# Altium PCB Array V1.PcbDoc (part 2 of 2)
Units mm, origin at the board's own origin, x right, y up, seen from the top; angles counter-clockwise.
Board outline 84 x 84 mm, 4 copper layers (Top Copper, GND, VS, Bottom Copper), stack 1.97 mm thick; 132 components, 130 nets, 568 pads, 280 vias.
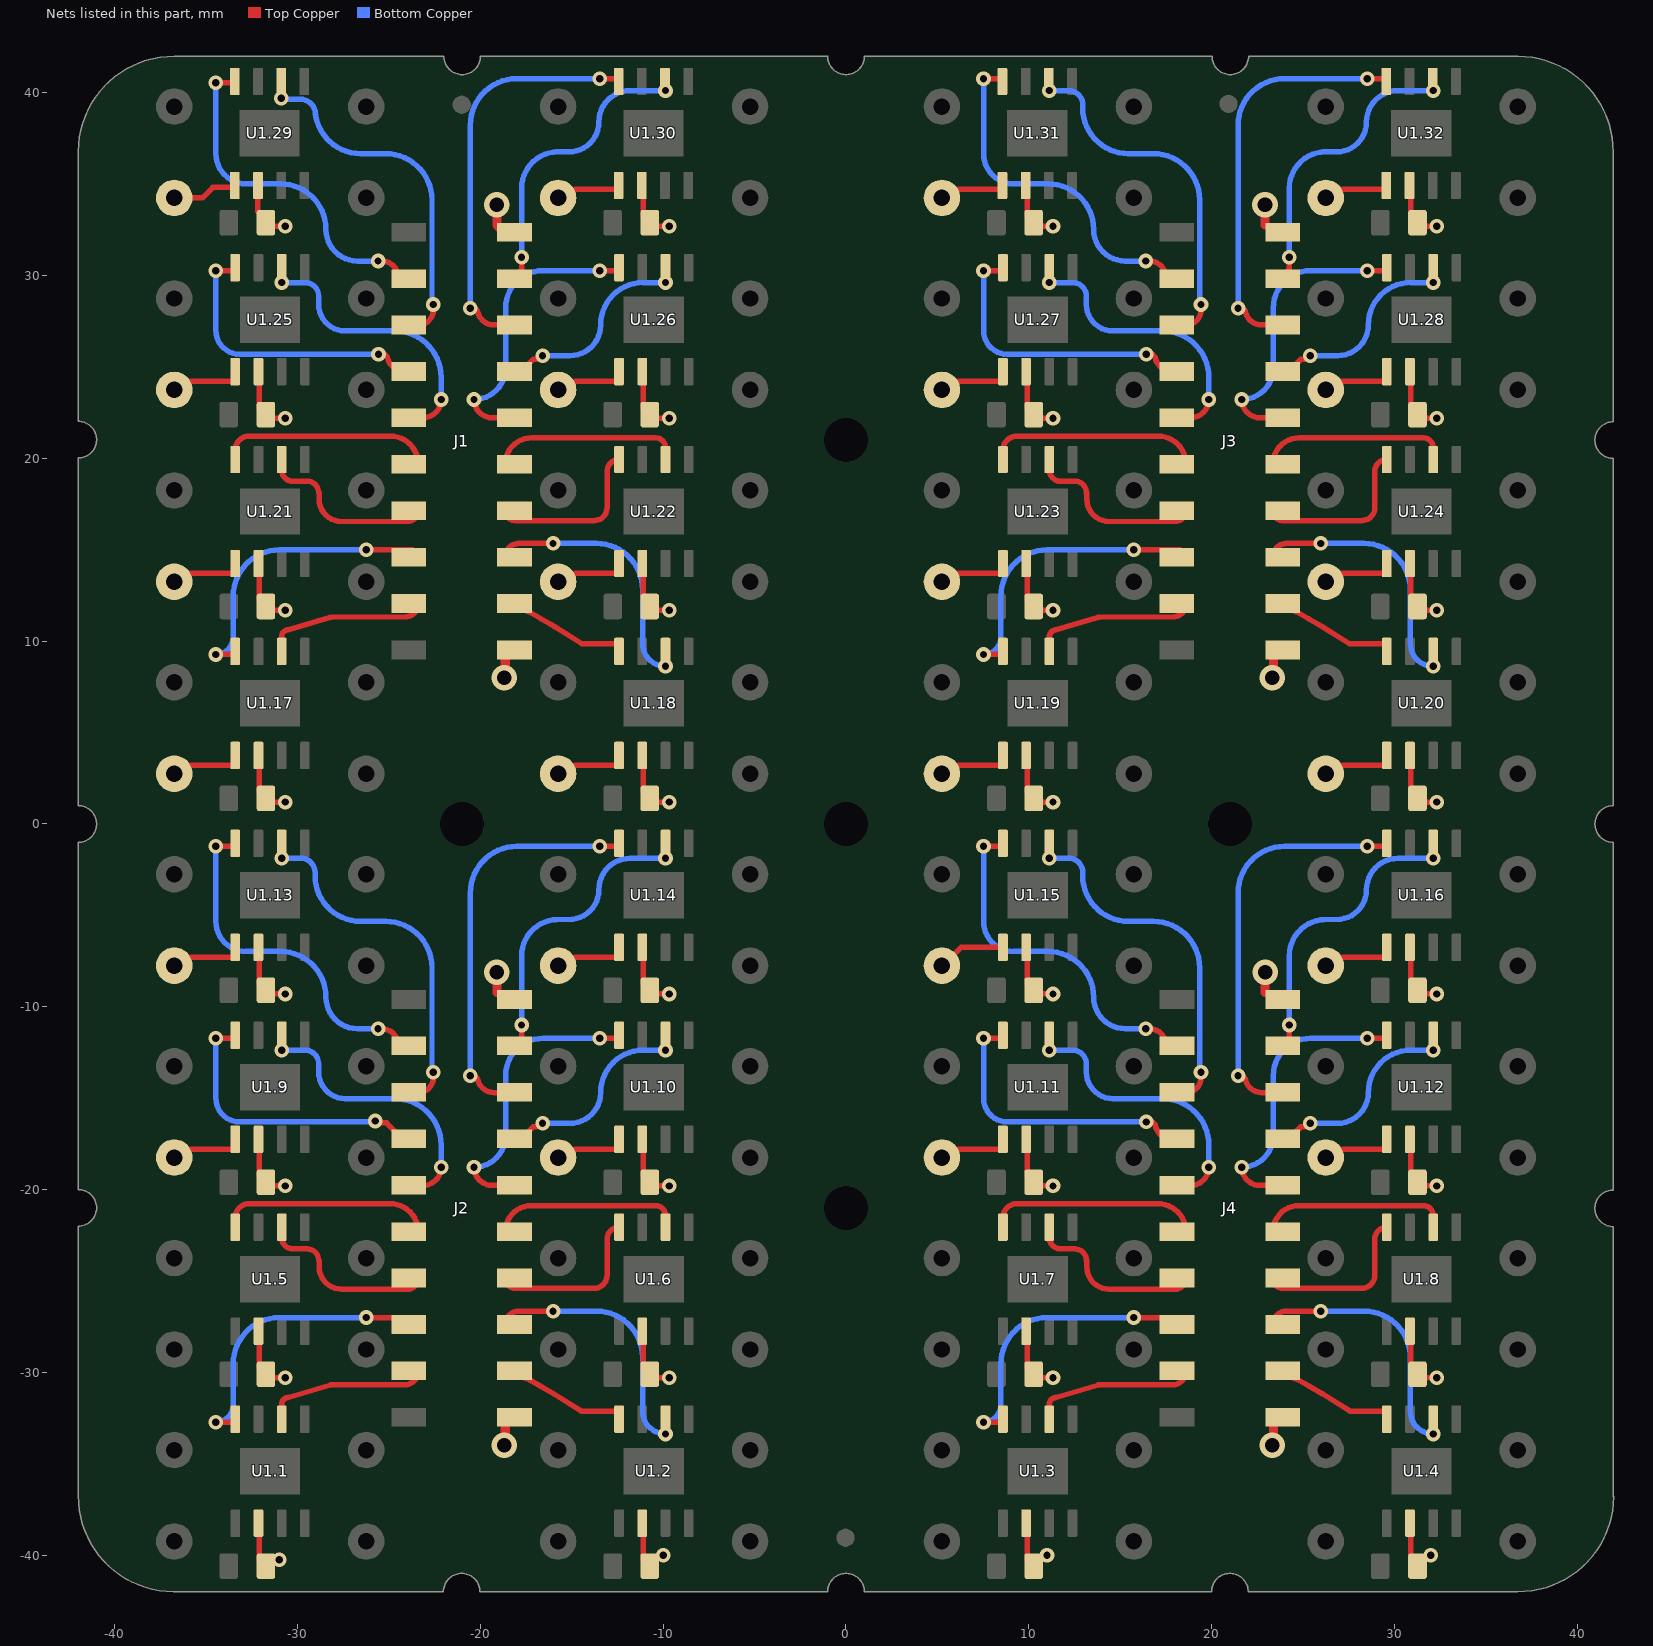
[diagram p4: the nets of this part, all layers, seen from the top]

## Via types
v1: diameter 0.8, hole 0.4, Top Copper to Bottom Copper, tented both sides, 144 vias
v2: diameter 0.8, hole 0.4, Top Copper to Bottom Copper, tented bottom, 128 vias
v3: diameter 1.4, hole 0.8, Top Copper to Bottom Copper, tented both sides, 8 vias

## Nets (pads, with @x,y where several pads share a name; then routed paths per layer and width w, separated by ;. In a path a pad name is that pad's centre, name@x,y a point inside that pad or via, vN(x,y) a via of type N, cw(c..) or ccw(c..) an arc to the next point about the centre after c; other vN are vias at no path point) (continued)
Out2.9: 41.+ U1.9.5 | length 4
  Top Copper w0.3: 41.+@-36.75,-18.25 -36.29,-18.25 -35.824,-17.784 -33.53,-17.784 -33.415,-17.669 U1.9.5@-33.415,-17.25
Out2.10: 43.+ U1.10.5 | length 4
  Top Copper w0.3: 43.+@-15.75,-18.25 -15.29,-18.25 -14.824,-17.784 -12.53,-17.784 -12.415,-17.669 U1.10.5@-12.415,-17.25
Out2.11: 45.+ U1.11.5 | length 4
  Top Copper w0.3: 45.+@5.25,-18.25 5.71,-18.25 6.176,-17.784 8.47,-17.784 8.585,-17.669 U1.11.5@8.585,-17.25
Out2.12: 47.+ U1.12.5 | length 4
  Top Copper w0.3: 47.+@26.25,-18.25 26.71,-18.25 27.176,-17.784 29.47,-17.784 29.585,-17.669 U1.12.5@29.585,-17.25
Out2.13: 33.+ U1.13.5 | length 4
  Top Copper w0.3: 33.+@-36.75,-7.75 -36.29,-7.75 -35.824,-7.284 -33.53,-7.284 -33.415,-7.169 U1.13.5@-33.415,-6.75
Out2.14: 35.+ U1.14.5 | length 4
  Top Copper w0.3: 35.+@-15.75,-7.75 -15.29,-7.75 -14.824,-7.284 -12.53,-7.284 -12.415,-7.169 U1.14.5@-12.415,-6.75
Out2.15: 37.+ U1.15.5 | length 3.7
  Top Copper w0.3: 37.+@5.25,-7.75 5.301,-7.75 6.301,-6.75 U1.15.5@8.585,-6.75
Out2.16: 39.+ U1.16.5 | length 4
  Top Copper w0.3: 39.+@26.25,-7.75 26.71,-7.75 27.176,-7.284 29.47,-7.284 29.585,-7.169 U1.16.5@29.585,-6.75
Out2.17: 25.+ U1.17.5 | length 4
  Top Copper w0.3: 25.+@-36.75,2.75 -36.29,2.75 -35.824,3.216 -33.53,3.216 -33.415,3.331 U1.17.5@-33.415,3.75
Out2.18: 27.+ U1.18.5 | length 4
  Top Copper w0.3: 27.+@-15.75,2.75 -15.29,2.75 -14.824,3.216 -12.53,3.216 -12.415,3.331 U1.18.5@-12.415,3.75
Out2.19: 29.+ U1.19.5 | length 4
  Top Copper w0.3: 29.+@5.25,2.75 5.71,2.75 6.176,3.216 8.47,3.216 8.585,3.331 U1.19.5@8.585,3.75
Out2.20: 31.+ U1.20.5 | length 4
  Top Copper w0.3: 31.+@26.25,2.75 26.71,2.75 27.176,3.216 29.47,3.216 29.585,3.331 U1.20.5@29.585,3.75
Out2.21: 17.+ U1.21.5 | length 4
  Top Copper w0.3: 17.+@-36.75,13.25 -36.29,13.25 -35.824,13.716 -33.53,13.716 -33.415,13.831 U1.21.5@-33.415,14.25
Out2.22: 19.+ U1.22.5 | length 4
  Top Copper w0.3: 19.+@-15.75,13.25 -15.29,13.25 -14.824,13.716 -12.53,13.716 -12.415,13.831 U1.22.5@-12.415,14.25
Out2.23: 21.+ U1.23.5 | length 4
  Top Copper w0.3: 21.+@5.25,13.25 5.71,13.25 6.176,13.716 8.47,13.716 8.585,13.831 U1.23.5@8.585,14.25
Out2.24: 23.+ U1.24.5 | length 4
  Top Copper w0.3: 23.+@26.25,13.25 26.71,13.25 27.176,13.716 29.47,13.716 29.585,13.831 U1.24.5@29.585,14.25
Out2.25: 9.+ U1.25.5 | length 4
  Top Copper w0.3: 9.+@-36.75,23.75 -36.29,23.75 -35.824,24.216 -33.53,24.216 -33.415,24.331 U1.25.5@-33.415,24.75
Out2.26: 11.+ U1.26.5 | length 4
  Top Copper w0.3: 11.+@-15.75,23.75 -15.29,23.75 -14.824,24.216 -12.53,24.216 -12.415,24.331 U1.26.5@-12.415,24.75
Out2.27: 13.+ U1.27.5 | length 4
  Top Copper w0.3: 13.+@5.25,23.75 5.71,23.75 6.176,24.216 8.47,24.216 8.585,24.331 U1.27.5@8.585,24.75
Out2.28: 15.+ U1.28.5 | length 4
  Top Copper w0.3: 15.+@26.25,23.75 26.71,23.75 27.176,24.216 29.47,24.216 29.585,24.331 U1.28.5@29.585,24.75
Out2.29: 1.+ U1.29.5 | length 4
  Top Copper w0.3: 1.+@-36.75,34.25 -35.214,34.25 -34.632,34.831 -33.415,34.831 U1.29.5@-33.415,35.25
Out2.30: 3.+ U1.30.5 | length 4
  Top Copper w0.3: 3.+@-15.75,34.25 -15.29,34.25 -14.824,34.716 -12.53,34.716 -12.415,34.831 U1.30.5@-12.415,35.25
Out2.31: 5.+ U1.31.5 | length 4
  Top Copper w0.3: 5.+@5.25,34.25 5.71,34.25 6.176,34.716 8.47,34.716 8.585,34.831 U1.31.5@8.585,35.25
Out2.32: 7.+ U1.32.5 | length 4
  Top Copper w0.3: 7.+@26.25,34.25 26.71,34.25 27.176,34.716 29.47,34.716 29.585,34.831 U1.32.5@29.585,35.25
sigA1: J2.17 U1.1.2 | length 9
  Top Copper w0.3: U1.1.2@-30.875,-32.56 -30.875,-31.75 cw(c-30.5,-31.75) -30.5,-31.375 -28.192,-30.688 cw(c-28.106,-30.975) -28.106,-30.675 -24.14,-30.675 ccw(c-24.14,-29.935) J2.17@-23.4,-29.935
sigA2: J2.16 U1.2.2 | length 15.1
  Top Copper w0.3: J2.16@-18.646,-27.395 cw(c-17.901,-27.395) -17.901,-26.65 v1(-16.025,-26.65) ; v1(-9.875,-33.375) U1.2.2@-9.875,-32.56
  Bottom Copper w0.3: v1(-16.025,-26.65) -13.665,-26.65 cw(c-13.665,-29.19) -11.125,-29.19 -11.125,-32.125 ccw(c-9.875,-32.125) v1(-9.875,-33.375)
sigA3: J4.17 U1.3.2 | length 9
  Top Copper w0.3: U1.3.2@11.125,-32.56 11.125,-31.75 cw(c11.5,-31.75) 11.5,-31.375 13.808,-30.688 cw(c13.894,-30.975) 13.894,-30.675 17.86,-30.675 ccw(c17.86,-29.935) J4.17@18.6,-29.935
sigA4: J4.16 U1.4.2 | length 15.1
  Top Copper w0.3: J4.16@23.354,-27.395 cw(c24.099,-27.395) 24.099,-26.65 v1(25.975,-26.65) ; v1(32.125,-33.375) U1.4.2@32.125,-32.56
  Bottom Copper w0.3: v1(25.975,-26.65) 28.335,-26.65 cw(c28.335,-29.19) 30.875,-29.19 30.875,-32.125 ccw(c32.125,-32.125) v1(32.125,-33.375)
sigA5: J2.13 U1.5.2 | length 10.1
  Top Copper w0.3: U1.5.2@-30.875,-22.06 -30.875,-22.625 ccw(c-30.25,-22.625) -30.25,-23.25 -29.475,-23.25 cw(c-29.475,-23.875) -28.85,-23.875 cw(c-28.85,-23.9) -28.825,-23.9 -28.825,-24.225 ccw(c-27.6,-24.225) -27.6,-25.45 -23.995,-25.45 ccw(c-23.995,-24.855) J2.13@-23.4,-24.855
sigA6: J2.12 U1.6.2 | length 10.5
  Top Copper w0.3: J2.12@-18.646,-22.315 cw(c-17.206,-22.315) -17.206,-20.875 -10.425,-20.875 cw(c-10.425,-21.425) -9.875,-21.425 U1.6.2@-9.875,-22.06
sigA7: J4.13 U1.7.2 | length 10.1
  Top Copper w0.3: U1.7.2@11.125,-22.06 11.125,-22.625 ccw(c11.75,-22.625) 11.75,-23.25 12.525,-23.25 cw(c12.525,-23.875) 13.15,-23.875 cw(c13.15,-23.9) 13.175,-23.9 13.175,-24.225 ccw(c14.4,-24.225) 14.4,-25.45 18.005,-25.45 ccw(c18.005,-24.855) J4.13@18.6,-24.855
sigA8: J4.12 U1.8.2 | length 10.5
  Top Copper w0.3: J4.12@23.354,-22.315 cw(c24.794,-22.315) 24.794,-20.875 31.575,-20.875 cw(c31.575,-21.425) 32.125,-21.425 U1.8.2@32.125,-22.06
sigA9: J2.09 U1.9.2 | length 15.7
  Top Copper w0.3: v1(-30.875,-12.375) -30.875,-12.16 U1.9.2@-30.875,-11.56 ; J2.09@-23.4,-19.775 -23.15,-19.775 ccw(c-23.15,-18.775) v1(-22.15,-18.775)
  Bottom Copper w0.3: v1(-30.875,-12.375) -29.6,-12.375 cw(c-29.6,-13.125) -28.85,-13.125 -28.85,-13.575 ccw(c-27.4,-13.575) -27.4,-15.025 -24.69,-15.025 cw(c-24.69,-17.565) -22.15,-17.565 v1(-22.15,-18.775)
sigA10: J2.08 U1.10.2 | length 12.2
  Top Copper w0.3: J2.08@-18.646,-17.235 -17.781,-17.235 -17.121,-16.575 -16.935,-16.575 -16.735,-16.375 v1(-16.6,-16.375) ; v1(-9.875,-12.375) U1.10.2@-9.875,-11.56
  Bottom Copper w0.3: v1(-16.6,-16.375) -15.1,-16.375 ccw(c-15.1,-14.7) -13.425,-14.7 cw(c-11.1,-14.7) -11.1,-12.375 v1(-9.875,-12.375)
sigA11: J4.09 U1.11.2 | length 15.7
  Top Copper w0.3: v1(11.125,-12.375) 11.125,-12.16 U1.11.2@11.125,-11.56 ; J4.09@18.6,-19.775 18.85,-19.775 ccw(c18.85,-18.775) v1(19.85,-18.775)
  Bottom Copper w0.3: v1(11.125,-12.375) 12.4,-12.375 cw(c12.4,-13.125) 13.15,-13.125 13.15,-13.575 ccw(c14.6,-13.575) 14.6,-15.025 17.31,-15.025 cw(c17.31,-17.565) 19.85,-17.565 v1(19.85,-18.775)
sigA12: J4.08 U1.12.2 | length 12.2
  Top Copper w0.3: J4.08@23.354,-17.235 24.219,-17.235 24.879,-16.575 25.065,-16.575 25.265,-16.375 v1(25.4,-16.375) ; v1(32.125,-12.375) U1.12.2@32.125,-11.56
  Bottom Copper w0.3: v1(25.4,-16.375) 26.9,-16.375 ccw(c26.9,-14.7) 28.575,-14.7 cw(c30.9,-14.7) 30.9,-12.375 v1(32.125,-12.375)
sigA13: J2.05 U1.13.2 | length 19.9
  Top Copper w0.3: v1(-30.875,-1.875) U1.13.2@-30.875,-1.06 ; J2.05@-23.4,-14.695 ccw(c-23.4,-13.87) -22.575,-13.87 v1(-22.575,-13.575)
  Bottom Copper w0.3: v1(-30.875,-1.875) -29.825,-1.875 cw(c-29.825,-2.65) -29.05,-2.65 -29.05,-2.825 ccw(c-26.55,-2.825) -26.55,-5.325 -25.19,-5.325 cw(c-25.19,-7.865) -22.65,-7.865 -22.65,-13.5 v1(-22.575,-13.575)
sigA14: J2.04 U1.14.2 | length 17.3
  Top Copper w0.3: J2.04@-18.646,-12.155 -18.235,-12.155 -17.75,-11.67 v1(-17.75,-11) ; v1(-9.875,-1.875) -9.875,-1.66 U1.14.2@-9.875,-1.06
  Bottom Copper w0.3: v1(-17.75,-11) -17.75,-7.225 cw(c-15.75,-7.225) -16.018,-5.243 cw(c-15.75,-7.225) -15.75,-5.225 -15.15,-5.225 ccw(c-15.15,-3.6) -13.525,-3.6 cw(c-11.8,-3.6) -11.8,-1.875 v1(-9.875,-1.875)
sigA15: J4.05 U1.15.2 | length 19.9
  Top Copper w0.3: v1(11.125,-1.875) U1.15.2@11.125,-1.06 ; J4.05@18.6,-14.695 ccw(c18.6,-13.87) 19.425,-13.87 v1(19.425,-13.575)
  Bottom Copper w0.3: v1(11.125,-1.875) 12.175,-1.875 cw(c12.175,-2.65) 12.95,-2.65 12.95,-2.825 ccw(c15.45,-2.825) 15.45,-5.325 16.81,-5.325 cw(c16.81,-7.865) 19.35,-7.865 19.35,-13.5 v1(19.425,-13.575)
sigA16: J4.04 U1.16.2 | length 17.3
  Top Copper w0.3: J4.04@23.354,-12.155 23.765,-12.155 24.25,-11.67 v1(24.25,-11) ; v1(32.125,-1.875) 32.125,-1.66 U1.16.2@32.125,-1.06
  Bottom Copper w0.3: v1(24.25,-11) 24.25,-7.225 cw(c26.25,-7.225) 25.982,-5.243 cw(c26.25,-7.225) 26.25,-5.225 26.85,-5.225 ccw(c26.85,-3.6) 28.475,-3.6 cw(c30.2,-3.6) 30.2,-1.875 v1(32.125,-1.875)
sigA17: J1.17 U1.17.2 | length 9
  Top Copper w0.3: U1.17.2@-30.875,9.44 -30.875,10.25 cw(c-30.5,10.25) -30.5,10.625 -28.192,11.312 cw(c-28.106,11.025) -28.106,11.325 -24.14,11.325 ccw(c-24.14,12.065) J1.17@-23.4,12.065
sigA18: J1.16 U1.18.2 | length 15.1
  Top Copper w0.3: J1.16@-18.646,14.605 cw(c-17.901,14.605) -17.901,15.35 v1(-16.025,15.35) ; v1(-9.875,8.625) U1.18.2@-9.875,9.44
  Bottom Copper w0.3: v1(-16.025,15.35) -13.665,15.35 cw(c-13.665,12.81) -11.125,12.81 -11.125,9.875 ccw(c-9.875,9.875) v1(-9.875,8.625)
sigA19: J3.17 U1.19.2 | length 9
  Top Copper w0.3: U1.19.2@11.125,9.44 11.125,10.25 cw(c11.5,10.25) 11.5,10.625 13.808,11.312 cw(c13.894,11.025) 13.894,11.325 17.86,11.325 ccw(c17.86,12.065) J3.17@18.6,12.065
sigA20: J3.16 U1.20.2 | length 15.1
  Top Copper w0.3: J3.16@23.354,14.605 cw(c24.099,14.605) 24.099,15.35 v1(25.975,15.35) ; v1(32.125,8.625) U1.20.2@32.125,9.44
  Bottom Copper w0.3: v1(25.975,15.35) 28.335,15.35 cw(c28.335,12.81) 30.875,12.81 30.875,9.875 ccw(c32.125,9.875) v1(32.125,8.625)
sigA21: J1.13 U1.21.2 | length 10.1
  Top Copper w0.3: U1.21.2@-30.875,19.94 -30.875,19.375 ccw(c-30.25,19.375) -30.25,18.75 -29.475,18.75 cw(c-29.475,18.125) -28.85,18.125 cw(c-28.85,18.1) -28.825,18.1 -28.825,17.775 ccw(c-27.6,17.775) -27.6,16.55 -23.995,16.55 ccw(c-23.995,17.145) J1.13@-23.4,17.145
sigA22: J1.12 U1.22.2 | length 10.5
  Top Copper w0.3: J1.12@-18.646,19.685 cw(c-17.206,19.685) -17.206,21.125 -10.425,21.125 cw(c-10.425,20.575) -9.875,20.575 U1.22.2@-9.875,19.94
sigA23: J3.13 U1.23.2 | length 10.1
  Top Copper w0.3: U1.23.2@11.125,19.94 11.125,19.375 ccw(c11.75,19.375) 11.75,18.75 12.525,18.75 cw(c12.525,18.125) 13.15,18.125 cw(c13.15,18.1) 13.175,18.1 13.175,17.775 ccw(c14.4,17.775) 14.4,16.55 18.005,16.55 ccw(c18.005,17.145) J3.13@18.6,17.145
sigA24: J3.12 U1.24.2 | length 10.5
  Top Copper w0.3: J3.12@23.354,19.685 cw(c24.794,19.685) 24.794,21.125 31.575,21.125 cw(c31.575,20.575) 32.125,20.575 U1.24.2@32.125,19.94
sigA25: J1.09 U1.25.2 | length 15.7
  Top Copper w0.3: v1(-30.875,29.625) -30.875,29.84 U1.25.2@-30.875,30.44 ; J1.09@-23.4,22.225 -23.15,22.225 ccw(c-23.15,23.225) v1(-22.15,23.225)
  Bottom Copper w0.3: v1(-30.875,29.625) -29.6,29.625 cw(c-29.6,28.875) -28.85,28.875 -28.85,28.425 ccw(c-27.4,28.425) -27.4,26.975 -24.69,26.975 cw(c-24.69,24.435) -22.15,24.435 v1(-22.15,23.225)
sigA26: J1.08 U1.26.2 | length 12.2
  Top Copper w0.3: J1.08@-18.646,24.765 -17.781,24.765 -17.121,25.425 -16.935,25.425 -16.735,25.625 v1(-16.6,25.625) ; v1(-9.875,29.625) U1.26.2@-9.875,30.44
  Bottom Copper w0.3: v1(-16.6,25.625) -15.1,25.625 ccw(c-15.1,27.3) -13.425,27.3 cw(c-11.1,27.3) -11.1,29.625 v1(-9.875,29.625)
sigA27: J3.09 U1.27.2 | length 15.7
  Top Copper w0.3: v1(11.125,29.625) 11.125,29.84 U1.27.2@11.125,30.44 ; J3.09@18.6,22.225 18.85,22.225 ccw(c18.85,23.225) v1(19.85,23.225)
  Bottom Copper w0.3: v1(11.125,29.625) 12.4,29.625 cw(c12.4,28.875) 13.15,28.875 13.15,28.425 ccw(c14.6,28.425) 14.6,26.975 17.31,26.975 cw(c17.31,24.435) 19.85,24.435 v1(19.85,23.225)
sigA28: J3.08 U1.28.2 | length 12.2
  Top Copper w0.3: J3.08@23.354,24.765 24.219,24.765 24.879,25.425 25.065,25.425 25.265,25.625 v1(25.4,25.625) ; v1(32.125,29.625) U1.28.2@32.125,30.44
  Bottom Copper w0.3: v1(25.4,25.625) 26.9,25.625 ccw(c26.9,27.3) 28.575,27.3 cw(c30.9,27.3) 30.9,29.625 v1(32.125,29.625)
sigA29: J1.05 U1.29.2 | length 19.7
  Top Copper w0.3: v1@-30.901,39.704 U1.29.2@-30.901,40.624 ; J1.05@-23.4,27.305 ccw(c-23.4,28.13) -22.575,28.13 v1(-22.575,28.425)
  Bottom Copper w0.3: v1(-30.9,39.703) -30.847,39.65 -29.856,39.65 cw(c-29.856,38.818) -29.044,38.996 ; -29.024,38.818 ccw(c-29.856,38.818) -29.044,38.996 ; v1(-22.575,28.425) -22.65,28.5 -22.65,34.135 ccw(c-25.19,34.135) -25.19,36.675 -26.55,36.675 cw(c-26.55,39.175) -29.044,38.996
sigA30: J1.04 U1.30.2 | length 17.3
  Top Copper w0.3: J1.04@-18.646,29.845 -18.235,29.845 -17.75,30.33 v1(-17.75,31) ; v1(-9.875,40.125) -9.875,40.34 U1.30.2@-9.875,40.94
  Bottom Copper w0.3: v1(-17.75,31) -17.75,34.775 cw(c-15.75,34.775) -16.018,36.757 cw(c-15.75,34.775) -15.75,36.775 -15.15,36.775 ccw(c-15.15,38.4) -13.525,38.4 cw(c-11.8,38.4) -11.8,40.125 v1(-9.875,40.125)
sigA31: J3.05 U1.31.2 | length 19.9
  Top Copper w0.3: v1(11.125,40.125) U1.31.2@11.125,40.94 ; J3.05@18.6,27.305 ccw(c18.6,28.13) 19.425,28.13 v1(19.425,28.425)
  Bottom Copper w0.3: v1(11.125,40.125) 12.175,40.125 cw(c12.175,39.35) 12.95,39.35 12.95,39.175 ccw(c15.45,39.175) 15.45,36.675 16.81,36.675 cw(c16.81,34.135) 19.35,34.135 19.35,28.5 v1(19.425,28.425)
sigA32: J3.04 U1.32.2 | length 17.3
  Top Copper w0.3: J3.04@23.354,29.845 23.765,29.845 24.25,30.33 v1(24.25,31) ; v1(32.125,40.125) 32.125,40.34 U1.32.2@32.125,40.94
  Bottom Copper w0.3: v1(24.25,31) 24.25,34.775 cw(c26.25,34.775) 25.982,36.757 cw(c26.25,34.775) 26.25,36.775 26.85,36.775 ccw(c26.85,38.4) 28.475,38.4 cw(c30.2,38.4) 30.2,40.125 v1(32.125,40.125)
sigB1: J2.15 U1.1.4 | length 16.7
  Top Copper w0.2: U1.1.4@-33.58,-32.725 U1.1.4@-33.415,-32.56
  Top Copper w0.3: v1(-34.475,-32.725) U1.1.4@-33.58,-32.725 ; v1(-26.25,-27) -23.795,-27 cw(c-23.795,-27.395) J2.15@-23.4,-27.395
  Bottom Copper w0.3: v1(-34.475,-32.725) ccw(c-34.475,-31.775) -33.525,-31.775 -33.525,-29.54 cw(c-30.985,-29.54) -30.985,-27 v1(-26.25,-27)
sigB2: J2.18 U1.2.4 | length 6.9
  Top Copper w0.3: J2.18@-18.646,-29.935 -17.296,-30.42 -16.694,-30.769 -15.954,-31.198 -14.447,-32.136 -12.53,-32.136 U1.2.4@-12.498,-32.348
sigB3: J4.15 U1.3.4 | length 16.7
  Top Copper w0.2: U1.3.4@8.42,-32.725 U1.3.4@8.585,-32.56
  Top Copper w0.3: v1(7.525,-32.725) U1.3.4@8.42,-32.725 ; v1(15.75,-27) 18.205,-27 cw(c18.205,-27.395) J4.15@18.6,-27.395
  Bottom Copper w0.3: v1(7.525,-32.725) ccw(c7.525,-31.775) 8.475,-31.775 8.475,-29.54 cw(c11.015,-29.54) 11.015,-27 v1(15.75,-27)
sigB4: J4.18 U1.4.4 | length 6.9
  Top Copper w0.3: J4.18@23.381,-29.915 24.731,-30.4 25.333,-30.749 26.073,-31.178 27.58,-32.116 29.497,-32.116 U1.4.4@29.53,-32.328
sigB5: J2.11 U1.5.4 | length 11.9
  Top Copper w0.3: U1.5.4@-33.415,-22.06 -33.415,-21.54 cw(c-32.65,-21.54) -32.65,-20.775 -24.94,-20.775 cw(c-24.94,-22.315) J2.11@-23.4,-22.315
sigB6: J2.14 U1.6.4 | length 9.3
  Top Copper w0.3: J2.14@-18.646,-24.855 ccw(c-18.101,-24.855) -18.101,-25.4 -13.775,-25.4 ccw(c-13.775,-24.7) -13.075,-24.7 -13.075,-22.72 cw(c-12.415,-22.72) U1.6.4@-12.415,-22.06
sigB7: J4.11 U1.7.4 | length 11.9
  Top Copper w0.3: U1.7.4@8.585,-22.06 8.585,-21.54 cw(c9.35,-21.54) 9.35,-20.775 17.06,-20.775 cw(c17.06,-22.315) J4.11@18.6,-22.315
sigB8: J4.14 U1.8.4 | length 9.3
  Top Copper w0.3: J4.14@23.354,-24.855 ccw(c23.899,-24.855) 23.899,-25.4 28.225,-25.4 ccw(c28.225,-24.7) 28.925,-24.7 28.925,-22.72 cw(c29.585,-22.72) U1.8.4@29.585,-22.06
sigB9: J2.07 U1.9.4 | length 16.6
  Top Copper w0.2: U1.9.4@-33.58,-11.725 U1.9.4@-33.415,-11.56
  Top Copper w0.3: v1(-34.475,-11.725) U1.9.4@-33.58,-11.725 ; v1(-25.75,-16.25) -25.654,-16.346 -25.134,-16.346 -24.245,-17.235 J2.07@-23.4,-17.235
  Bottom Copper w0.3: v1(-34.475,-11.725) -34.475,-15 ccw(c-33.175,-15) -33.175,-16.3 -25.8,-16.3 v1(-25.75,-16.25)
sigB10: J2.10 U1.10.4 | length 15.7
  Top Copper w0.2: U1.10.4@-12.58,-11.725 U1.10.4@-12.415,-11.56
  Top Copper w0.3: v1(-20.35,-18.775) ccw(c-19.35,-18.775) -19.35,-19.775 J2.10@-18.646,-19.775 ; v1(-13.475,-11.725) U1.10.4@-12.58,-11.725
  Bottom Copper w0.3: v1(-20.35,-18.775) ccw(c-20.35,-17.05) -18.625,-17.05 -18.625,-13.775 cw(c-16.575,-13.775) -16.575,-11.725 v1(-13.475,-11.725)
sigB11: J4.07 U1.11.4 | length 16.7
  Top Copper w0.2: U1.11.4@8.42,-11.725 U1.11.4@8.585,-11.56
  Top Copper w0.3: v1(7.525,-11.725) U1.11.4@8.42,-11.725 ; v1(16.425,-16.3) 16.761,-16.3 16.849,-16.388 16.912,-16.451 ccw(c17.835,-16.3) 17.835,-17.235 J4.07@18.6,-17.235
  Bottom Copper w0.3: v1(7.525,-11.725) 7.525,-15 ccw(c8.825,-15) 8.825,-16.3 v1(16.425,-16.3)
sigB12: J4.10 U1.12.4 | length 15.7
  Top Copper w0.2: U1.12.4@29.42,-11.725 U1.12.4@29.585,-11.56
  Top Copper w0.3: v1(21.65,-18.775) ccw(c22.65,-18.775) 22.65,-19.775 J4.10@23.354,-19.775 ; v1(28.525,-11.725) U1.12.4@29.42,-11.725
  Bottom Copper w0.3: v1(21.65,-18.775) ccw(c21.65,-17.05) 23.375,-17.05 23.375,-13.775 cw(c25.425,-13.775) 25.425,-11.725 v1(28.525,-11.725)
sigB13: J2.03 U1.13.4 | length 19.1
  Top Copper w0.2: U1.13.4@-33.58,-1.225 U1.13.4@-33.415,-1.06
  Top Copper w0.3: v1(-34.475,-1.225) U1.13.4@-33.58,-1.225 ; v1(-25.6,-11.2) -25.397,-11.2 cw(c-25.397,-12.096) -25.253,-11.212 cw(c-25.397,-12.096) J2.03@-24.501,-12.096
  Bottom Copper w0.3: v1(-34.475,-1.225) -34.475,-5.325 ccw(c-32.825,-5.325) -32.825,-6.975 -30.95,-6.975 cw(c-30.95,-9.475) -28.45,-9.475 ccw(c-26.725,-9.475) -26.725,-11.2 v1(-25.6,-11.2)
sigB14: J2.06 U1.14.4 | length 22
  Top Copper w0.2: U1.14.4@-12.58,-1.225 U1.14.4@-12.415,-1.06
  Top Copper w0.3: v1(-20.55,-13.775) -20.313,-13.775 -20.225,-13.863 -20.163,-13.926 ccw(c-19.255,-13.775) -19.255,-14.695 J2.06@-18.646,-14.695 ; v1(-13.475,-1.225) U1.14.4@-12.58,-1.225
  Bottom Copper w0.3: v1(-20.55,-13.775) -20.55,-3.765 cw(c-18.01,-3.765) -18.01,-1.225 v1(-13.475,-1.225)
sigB15: J4.03 U1.15.4 | length 19.1
  Top Copper w0.2: U1.15.4@8.42,-1.225 U1.15.4@8.585,-1.06
  Top Copper w0.3: v1(7.525,-1.225) U1.15.4@8.42,-1.225 ; v1(16.4,-11.2) 16.603,-11.2 cw(c16.603,-12.096) 16.747,-11.212 cw(c16.603,-12.096) J4.03@17.499,-12.096
  Bottom Copper w0.3: v1(7.525,-1.225) 7.525,-5.325 ccw(c9.175,-5.325) 9.175,-6.975 11.05,-6.975 cw(c11.05,-9.475) 13.55,-9.475 ccw(c15.275,-9.475) 15.275,-11.2 v1(16.4,-11.2)
sigB16: J4.06 U1.16.4 | length 22
  Top Copper w0.2: U1.16.4@29.42,-1.225 U1.16.4@29.585,-1.06
  Top Copper w0.3: v1(21.45,-13.775) 21.687,-13.775 21.775,-13.863 21.837,-13.926 ccw(c22.745,-13.775) 22.745,-14.695 J4.06@23.354,-14.695 ; v1(28.525,-1.225) U1.16.4@29.42,-1.225
  Bottom Copper w0.3: v1(21.45,-13.775) 21.45,-3.765 cw(c23.99,-3.765) 23.99,-1.225 v1(28.525,-1.225)
sigB17: J1.15 U1.17.4 | length 16.7
  Top Copper w0.2: U1.17.4@-33.58,9.275 U1.17.4@-33.415,9.44
  Top Copper w0.3: v1(-34.475,9.275) U1.17.4@-33.58,9.275 ; v1(-26.25,15) -23.795,15 cw(c-23.795,14.605) J1.15@-23.4,14.605
  Bottom Copper w0.3: v1(-34.475,9.275) ccw(c-34.475,10.225) -33.525,10.225 -33.525,12.46 cw(c-30.985,12.46) -30.985,15 v1(-26.25,15)
sigB18: J1.18 U1.18.4 | length 6.9
  Top Copper w0.3: J1.18@-18.646,12.065 -17.296,11.58 -16.694,11.231 -15.954,10.802 -14.447,9.864 -12.53,9.864 U1.18.4@-12.498,9.652
sigB19: J3.15 U1.19.4 | length 16.7
  Top Copper w0.2: U1.19.4@8.42,9.275 U1.19.4@8.585,9.44
  Top Copper w0.3: v1(7.525,9.275) U1.19.4@8.42,9.275 ; v1(15.75,15) 18.205,15 cw(c18.205,14.605) J3.15@18.6,14.605
  Bottom Copper w0.3: v1(7.525,9.275) ccw(c7.525,10.225) 8.475,10.225 8.475,12.46 cw(c11.015,12.46) 11.015,15 v1(15.75,15)
sigB20: J3.18 U1.20.4 | length 6.9
  Top Copper w0.3: J3.18@23.354,12.065 24.704,11.58 25.306,11.231 26.046,10.802 27.553,9.864 29.47,9.864 U1.20.4@29.503,9.652
sigB21: J1.11 U1.21.4 | length 11.9
  Top Copper w0.3: U1.21.4@-33.415,19.94 -33.415,20.46 cw(c-32.65,20.46) -32.65,21.225 -24.94,21.225 cw(c-24.94,19.685) J1.11@-23.4,19.685
sigB22: J1.14 U1.22.4 | length 9.3
  Top Copper w0.3: J1.14@-18.646,17.145 ccw(c-18.101,17.145) -18.101,16.6 -13.775,16.6 ccw(c-13.775,17.3) -13.075,17.3 -13.075,19.28 cw(c-12.415,19.28) U1.22.4@-12.415,19.94
sigB23: J3.11 U1.23.4 | length 11.9
  Top Copper w0.3: U1.23.4@8.585,19.94 8.585,20.46 cw(c9.35,20.46) 9.35,21.225 17.06,21.225 cw(c17.06,19.685) J3.11@18.6,19.685
sigB24: J3.14 U1.24.4 | length 9.3
  Top Copper w0.3: J3.14@23.354,17.145 ccw(c23.899,17.145) 23.899,16.6 28.225,16.6 ccw(c28.225,17.3) 28.925,17.3 28.925,19.28 cw(c29.585,19.28) U1.24.4@29.585,19.94
sigB25: J1.07 U1.25.4 | length 16.7
  Top Copper w0.2: U1.25.4@-33.58,30.275 U1.25.4@-33.415,30.44
  Top Copper w0.3: v1(-34.475,30.275) U1.25.4@-33.58,30.275 ; v1(-25.575,25.7) -25.239,25.7 -25.151,25.612 -25.088,25.549 ccw(c-24.165,25.7) -24.165,24.765 J1.07@-23.4,24.765
  Bottom Copper w0.3: v1(-34.475,30.275) -34.475,27 ccw(c-33.175,27) -33.175,25.7 v1(-25.575,25.7)
sigB26: J1.10 U1.26.4 | length 15.7
  Top Copper w0.2: U1.26.4@-12.58,30.275 U1.26.4@-12.415,30.44
  Top Copper w0.3: v1(-20.35,23.225) ccw(c-19.35,23.225) -19.35,22.225 J1.10@-18.646,22.225 ; v1(-13.475,30.275) U1.26.4@-12.58,30.275
  Bottom Copper w0.3: v1(-20.35,23.225) ccw(c-20.35,24.95) -18.625,24.95 -18.625,28.225 cw(c-16.575,28.225) -16.575,30.275 v1(-13.475,30.275)
sigB27: J3.07 U1.27.4 | length 16.7
  Top Copper w0.2: U1.27.4@8.42,30.275 U1.27.4@8.585,30.44
  Top Copper w0.3: v1(7.525,30.275) U1.27.4@8.42,30.275 ; v1(16.425,25.7) 16.761,25.7 16.849,25.612 16.912,25.549 ccw(c17.835,25.7) 17.835,24.765 J3.07@18.6,24.765
  Bottom Copper w0.3: v1(7.525,30.275) 7.525,27 ccw(c8.825,27) 8.825,25.7 v1(16.425,25.7)
sigB28: J3.10 U1.28.4 | length 15.7
  Top Copper w0.2: U1.28.4@29.42,30.275 U1.28.4@29.585,30.44
  Top Copper w0.3: v1(21.65,23.225) ccw(c22.65,23.225) 22.65,22.225 J3.10@23.354,22.225 ; v1(28.525,30.275) U1.28.4@29.42,30.275
  Bottom Copper w0.3: v1(21.65,23.225) ccw(c21.65,24.95) 23.375,24.95 23.375,28.225 cw(c25.425,28.225) 25.425,30.275 v1(28.525,30.275)
sigB29: J1.03 U1.29.4 | length 18.8
  Top Copper w0.3: v1(-34.475,40.55) -33.515,40.55 U1.29.4@-33.441,40.624 ; v1(-25.6,30.8) -25.397,30.8 cw(c-25.397,29.904) -25.253,30.788 cw(c-25.397,29.904) J1.03@-24.501,29.904
  Bottom Copper w0.3: v1(-34.475,40.55) -34.475,36.675 ccw(c-32.825,36.675) -32.825,35.025 -30.95,35.025 cw(c-30.95,32.525) -28.45,32.525 ccw(c-26.725,32.525) -26.725,30.8 v1(-25.6,30.8)
sigB30: J1.06 U1.30.4 | length 22
  Top Copper w0.2: U1.30.4@-12.58,40.775 U1.30.4@-12.415,40.94
  Top Copper w0.3: v1(-20.55,28.225) -20.313,28.225 -20.225,28.137 -20.163,28.074 ccw(c-19.255,28.225) -19.255,27.305 J1.06@-18.646,27.305 ; v1(-13.475,40.775) U1.30.4@-12.58,40.775
  Bottom Copper w0.3: v1(-20.55,28.225) -20.55,38.235 cw(c-18.01,38.235) -18.01,40.775 v1(-13.475,40.775)
sigB31: J3.03 U1.31.4 | length 19.1
  Top Copper w0.2: U1.31.4@8.42,40.775 U1.31.4@8.585,40.94
  Top Copper w0.3: v1(7.525,40.775) U1.31.4@8.42,40.775 ; v1(16.4,30.8) 16.603,30.8 cw(c16.603,29.904) 16.747,30.788 cw(c16.603,29.904) J3.03@17.499,29.904
  Bottom Copper w0.3: v1(7.525,40.775) 7.525,36.675 ccw(c9.175,36.675) 9.175,35.025 11.05,35.025 cw(c11.05,32.525) 13.55,32.525 ccw(c15.275,32.525) 15.275,30.8 v1(16.4,30.8)
sigB32: J3.06 U1.32.4 | length 22
  Top Copper w0.2: U1.32.4@29.42,40.775 U1.32.4@29.585,40.94
  Top Copper w0.3: v1(21.45,28.225) 21.687,28.225 21.775,28.137 21.837,28.074 ccw(c22.745,28.225) 22.745,27.305 J3.06@23.354,27.305 ; v1(28.525,40.775) U1.32.4@29.42,40.775
  Bottom Copper w0.3: v1(21.45,28.225) 21.45,38.235 cw(c23.99,38.235) 23.99,40.775 v1(28.525,40.775)
VS: C1.1.1 C1.2.1 C1.3.1 C1.4.1 C1.5.1 C1.6.1 C1.7.1 C1.8.1 C1.9.1 C1.10.1 C1.11.1 C1.12.1 C1.13.1 C1.14.1 C1.15.1 C1.16.1 C1.17.1 C1.18.1 C1.19.1 C1.20.1 C1.21.1 C1.22.1 C1.23.1 C1.24.1 C1.25.1 C1.26.1 C1.27.1 C1.28.1 C1.29.1 C1.30.1 C1.31.1 C1.32.1 J1.02 J1.20 J2.02 J2.20 J3.02 J3.20 J4.02 J4.20 U1.1.6 U1.2.6 U1.3.6 U1.4.6 U1.5.6 U1.6.6 U1.7.6 U1.8.6 U1.9.6 U1.10.6 U1.11.6 U1.12.6 U1.13.6 U1.14.6 U1.15.6 U1.16.6 U1.17.6 U1.18.6 U1.19.6 U1.20.6 U1.21.6 U1.22.6 U1.23.6 U1.24.6 U1.25.6 U1.26.6 U1.27.6 U1.28.6 U1.29.6 U1.30.6 U1.31.6 U1.32.6 | length 127.7
  Top Copper w0.3: U1.29.6@-32.171,34.934 -32.171,33.528 -31.734,33.091 C1.29.1@-31.734,32.9 -31.534,32.7 v1(-30.675,32.7) ; U1.1.6@-32.145,-38.25 -32.092,-38.303 -32.092,-40.242 C1.1.1@-31.734,-40.6 -31.384,-40.25 v1(-31,-40.25) ; U1.5.6@-32.145,-27.75 -32.092,-27.803 -32.092,-29.742 C1.5.1@-31.734,-30.1 -31.534,-30.3 v1(-30.675,-30.3) ; U1.9.6@-32.145,-17.25 -32.092,-17.303 -32.092,-19.242 C1.9.1@-31.734,-19.6 -31.534,-19.8 v1(-30.675,-19.8) ; U1.13.6@-32.145,-6.75 -32.092,-6.803 -32.092,-8.742 C1.13.1@-31.734,-9.1 -31.534,-9.3 v1(-30.675,-9.3) ; U1.17.6@-32.145,3.75 -32.092,3.697 -32.092,1.758 C1.17.1@-31.734,1.4 -31.534,1.2 v1(-30.675,1.2) ; U1.21.6@-32.145,14.25 -32.092,14.197 -32.092,12.258 C1.21.1@-31.734,11.9 -31.534,11.7 v1(-30.675,11.7) ; U1.25.6@-32.145,24.75 -32.092,24.697 -32.092,22.758 C1.25.1@-31.734,22.4 -31.534,22.2 v1(-30.675,22.2) ; U1.29.6@-32.145,35.25 -32.092,35.197 U1.29.6@-32.092,34.934 ; U1.2.6@-11.145,-38.25 -11.092,-38.303 -11.092,-40.242 C1.2.1@-10.734,-40.6 -10.734,-40.447 -10.376,-40.089 -10.089,-40.089 v1(-10,-40) ; U1.6.6@-11.145,-27.75 -11.092,-27.803 -11.092,-29.742 C1.6.1@-10.734,-30.1 -10.534,-30.3 v1(-9.675,-30.3) ; U1.10.6@-11.145,-17.25 -11.092,-17.303 -11.092,-19.242 C1.10.1@-10.734,-19.6 -10.534,-19.8 v1(-9.675,-19.8) ; U1.14.6@-11.145,-6.75 -11.092,-6.803 -11.092,-8.742 C1.14.1@-10.734,-9.1 -10.534,-9.3 v1(-9.675,-9.3) ; U1.18.6@-11.145,3.75 -11.092,3.697 -11.092,1.758 C1.18.1@-10.734,1.4 -10.534,1.2 v1(-9.675,1.2) ; U1.22.6@-11.145,14.25 -11.092,14.197 -11.092,12.258 C1.22.1@-10.734,11.9 -10.534,11.7 v1(-9.675,11.7) ; U1.26.6@-11.145,24.75 -11.092,24.697 -11.092,22.758 C1.26.1@-10.734,22.4 -10.534,22.2 v1(-9.675,22.2) ; U1.30.6@-11.145,35.25 -11.092,35.197 -11.092,33.258 C1.30.1@-10.734,32.9 -10.534,32.7 v1(-9.675,32.7) ; U1.3.6@9.855,-38.25 9.908,-38.303 9.908,-40.242 C1.3.1@10.266,-40.6 10.266,-40.447 10.624,-40.089 10.911,-40.089 v1(11,-40) ; U1.7.6@9.855,-27.75 9.908,-27.803 9.908,-29.742 C1.7.1@10.266,-30.1 10.466,-30.3 v1(11.325,-30.3) ; U1.11.6@9.855,-17.25 9.908,-17.303 9.908,-19.242 C1.11.1@10.266,-19.6 10.466,-19.8 v1(11.325,-19.8) ; U1.15.6@9.855,-6.75 9.908,-6.803 9.908,-8.742 C1.15.1@10.266,-9.1 10.466,-9.3 v1(11.325,-9.3) ; U1.19.6@9.855,3.75 9.908,3.697 9.908,1.758 C1.19.1@10.266,1.4 10.466,1.2 v1(11.325,1.2) ; U1.23.6@9.855,14.25 9.908,14.197 9.908,12.258 C1.23.1@10.266,11.9 10.466,11.7 v1(11.325,11.7) ; U1.27.6@9.855,24.75 9.908,24.697 9.908,22.758 C1.27.1@10.266,22.4 10.466,22.2 v1(11.325,22.2) ; U1.31.6@9.855,35.25 9.908,35.197 9.908,33.258 C1.31.1@10.266,32.9 10.466,32.7 v1(11.325,32.7) ; U1.4.6@30.855,-38.25 30.908,-38.303 30.908,-40.242 C1.4.1@31.266,-40.6 31.266,-40.447 31.624,-40.089 31.911,-40.089 v1(32,-40) ; U1.8.6@30.855,-27.75 30.908,-27.803 30.908,-29.742 C1.8.1@31.266,-30.1 31.466,-30.3 v1(32.325,-30.3) ; U1.12.6@30.855,-17.25 30.908,-17.303 30.908,-19.242 C1.12.1@31.266,-19.6 31.466,-19.8 v1(32.325,-19.8) ; U1.16.6@30.855,-6.75 30.908,-6.803 30.908,-8.742 C1.16.1@31.266,-9.1 31.466,-9.3 v1(32.325,-9.3) ; U1.20.6@30.855,3.75 30.908,3.697 30.908,1.758 C1.20.1@31.266,1.4 31.466,1.2 v1(32.325,1.2) ; U1.24.6@30.855,14.25 30.908,14.197 30.908,12.258 C1.24.1@31.266,11.9 31.466,11.7 v1(32.325,11.7) ; U1.28.6@30.855,24.75 30.908,24.697 30.908,22.758 C1.28.1@31.266,22.4 31.466,22.2 v1(32.325,22.2) ; U1.32.6@30.855,35.25 30.908,35.197 30.908,33.258 C1.32.1@31.266,32.9 31.466,32.7 v1(32.325,32.7)
  Top Copper w0.5: -19.1,-9.21 v3(-19.1,-8.105) ; v3(-19.1,33.875) -19.1,32.77 -18.715,32.385 J1.02@-18.646,32.385 ; v3(-18.7,8) ccw(c-18.7,8.054) -18.646,8.054 J1.20@-18.646,9.525 ; v3@-18.646,-33.926 J2.20@-18.646,-32.455 ; 22.925,32.77 v3(22.925,33.875) ; 22.927,-9.21 v3(22.927,-8.105) ; v3@23.379,8.054 J3.20@23.379,9.525 ; v3@23.381,-33.926 J4.20@23.381,-32.455
  other v3: -18.7,-33.98 23.327,-33.98 23.325,8
pads on no net: U1.1.1 U1.1.8 U1.2.1 U1.2.8 U1.3.1 U1.3.8 U1.4.1 U1.4.8 U1.5.1 U1.5.8 U1.6.1 U1.6.8 U1.7.1 U1.7.8 U1.8.1 U1.8.8 U1.9.1 U1.9.8 U1.10.1 U1.10.8 U1.11.1 U1.11.8 U1.12.1 U1.12.8 U1.13.1 U1.13.8 U1.14.1 U1.14.8 U1.15.1 U1.15.8 U1.16.1 U1.16.8 U1.17.1 U1.17.8 U1.18.1 U1.18.8 U1.19.1 U1.19.8 U1.20.1 U1.20.8 U1.21.1 U1.21.8 U1.22.1 U1.22.8 U1.23.1 U1.23.8 U1.24.1 U1.24.8 U1.25.1 U1.25.8 U1.26.1 U1.26.8 U1.27.1 U1.27.8 U1.28.1 U1.28.8 U1.29.1 U1.29.8 U1.30.1 U1.30.8 U1.31.1 U1.31.8 U1.32.1 U1.32.8

## Polygon pours and split planes (outlines as drawn)
VS on VS "VSNEt" (solid, remove dead copper, pour order 0): -39.551,40.325 39.575,40.325 39.575,-40.275 -39.527,-40.275
GND on Top Copper "GNDNet" (solid, remove dead copper, pour order 1): -39.551,40.325 39.575,40.325 39.575,-40.275 -39.527,-40.275
GND on Bottom Copper "GNDNet" (solid, remove dead copper, pour order 2): -39.551,40.325 39.575,40.325 39.575,-40.275 -39.527,-40.275
GND on GND "GNDNet" (solid, remove dead copper, pour order 3): -39.551,40.325 39.575,40.325 39.575,-40.275 -39.527,-40.275

## Keep-outs
Keep-Out Layer:
  circle w0.5: c0,21 r1.45
  circle w0.5: c21,0 r1.45
  circle w0.5: c0,-21 r1.45
  circle w0.5: c0,0 r1.45
  circle w0.5: c-21,0 r1.45
  lines w0.1: -42,36.775 -42,22.025 cw(c-42,21.025) -42,20.025 -42,1 cw(c-42,0) -42,-1 -42,-20 cw(c-42,-21) -42,-22 -42,-36.75 ccw(c-36.775,-36.775) -36.8,-42 ; -42,36.8 cw(c-36.775,36.775) -36.75,42 -22,42 ccw(c-21,42) -20,42 -1,42 ccw(c0,42) 1,42 20.025,42 ccw(c21.025,42) 22.025,42 36.775,42 cw(c36.75,36.775) 41.975,36.75 41.975,22 ccw(c41.975,21) 41.975,20 41.975,1 ccw(c41.975,0) 41.975,-1 41.975,-20.025 ccw(c41.975,-21.025) 41.975,-22.025 41.975,-36.775 ; -36.775,-42 -22.025,-42 cw(c-21.025,-42) -20.025,-42 -1,-42 cw(c0,-42) 1,-42 20,-42 cw(c21,-42) 22,-42 36.75,-42 ccw(c36.775,-36.775) 42,-36.8

## Other copper
Top Copper:
  text "PCB by Ben Kazemi for MSD Group @ UCL" at 39.867,-38.175 h1 r90

## Silkscreen, mask and mechanical layers (free items; w line width, h text height)
Top Overlay:
  lines w2: -42,-2.016 ccw(c-42,0) -42,2.016
Bottom Overlay:
  lines w2: -42,-2.016 ccw(c-42,0) -42,2.016
Top Mask:
  text "PCB by Ben Kazemi for MSD Group @ UCL" at 39.867,-38.175 h1 r90

## Text inside footprints (layer, text, board x,y; h text height)
1: Top Overlay "+" at -36.013,31.975 h1.5 r90; Bottom Overlay "+" at -36.013,31.975 h1.5 r90
2: Top Overlay "+" at -25.513,31.975 h1.5 r90; Bottom Overlay "+" at -25.513,31.975 h1.5 r90
3: Top Overlay "+" at -15.013,31.975 h1.5 r90; Bottom Overlay "+" at -15.013,31.975 h1.5 r90
4: Top Overlay "+" at -4.513,31.975 h1.5 r90; Bottom Overlay "+" at -4.513,31.975 h1.5 r90
5: Top Overlay "+" at 5.987,31.975 h1.5 r90; Bottom Overlay "+" at 5.987,31.975 h1.5 r90
6: Top Overlay "+" at 16.487,31.975 h1.5 r90; Bottom Overlay "+" at 16.487,31.975 h1.5 r90
7: Top Overlay "+" at 26.987,31.975 h1.5 r90; Bottom Overlay "+" at 26.987,31.975 h1.5 r90
8: Top Overlay "+" at 37.487,31.975 h1.5 r90; Bottom Overlay "+" at 37.487,31.975 h1.5 r90
9: Top Overlay "+" at -36.013,21.475 h1.5 r90; Bottom Overlay "+" at -36.013,21.475 h1.5 r90
10: Top Overlay "+" at -25.513,21.475 h1.5 r90; Bottom Overlay "+" at -25.513,21.475 h1.5 r90
11: Top Overlay "+" at -15.013,21.475 h1.5 r90; Bottom Overlay "+" at -15.013,21.475 h1.5 r90
12: Top Overlay "+" at -4.513,21.475 h1.5 r90; Bottom Overlay "+" at -4.513,21.475 h1.5 r90
13: Top Overlay "+" at 5.987,21.475 h1.5 r90; Bottom Overlay "+" at 5.987,21.475 h1.5 r90
14: Top Overlay "+" at 16.487,21.475 h1.5 r90; Bottom Overlay "+" at 16.487,21.475 h1.5 r90
15: Top Overlay "+" at 26.987,21.475 h1.5 r90; Bottom Overlay "+" at 26.987,21.475 h1.5 r90
16: Top Overlay "+" at 37.487,21.475 h1.5 r90; Bottom Overlay "+" at 37.487,21.475 h1.5 r90
17: Top Overlay "+" at -36.013,10.975 h1.5 r90; Bottom Overlay "+" at -36.013,10.975 h1.5 r90
18: Top Overlay "+" at -25.513,10.975 h1.5 r90; Bottom Overlay "+" at -25.513,10.975 h1.5 r90
19: Top Overlay "+" at -15.013,10.975 h1.5 r90; Bottom Overlay "+" at -15.013,10.975 h1.5 r90
20: Top Overlay "+" at -4.513,10.975 h1.5 r90; Bottom Overlay "+" at -4.513,10.975 h1.5 r90
21: Top Overlay "+" at 5.987,10.975 h1.5 r90; Bottom Overlay "+" at 5.987,10.975 h1.5 r90
22: Top Overlay "+" at 16.487,10.975 h1.5 r90; Bottom Overlay "+" at 16.487,10.975 h1.5 r90
23: Top Overlay "+" at 26.987,10.975 h1.5 r90; Bottom Overlay "+" at 26.987,10.975 h1.5 r90
24: Top Overlay "+" at 37.487,10.975 h1.5 r90; Bottom Overlay "+" at 37.487,10.975 h1.5 r90
25: Top Overlay "+" at -36.013,0.475 h1.5 r90; Bottom Overlay "+" at -36.013,0.475 h1.5 r90
26: Top Overlay "+" at -25.513,0.475 h1.5 r90; Bottom Overlay "+" at -25.513,0.475 h1.5 r90
27: Top Overlay "+" at -15.013,0.475 h1.5 r90; Bottom Overlay "+" at -15.013,0.475 h1.5 r90
28: Top Overlay "+" at -4.513,0.475 h1.5 r90; Bottom Overlay "+" at -4.513,0.475 h1.5 r90
29: Top Overlay "+" at 5.987,0.475 h1.5 r90; Bottom Overlay "+" at 5.987,0.475 h1.5 r90
30: Top Overlay "+" at 16.487,0.475 h1.5 r90; Bottom Overlay "+" at 16.487,0.475 h1.5 r90
31: Top Overlay "+" at 26.987,0.475 h1.5 r90; Bottom Overlay "+" at 26.987,0.475 h1.5 r90
32: Top Overlay "+" at 37.487,0.475 h1.5 r90; Bottom Overlay "+" at 37.487,0.475 h1.5 r90
33: Top Overlay "+" at -36.013,-10.025 h1.5 r90; Bottom Overlay "+" at -36.013,-10.025 h1.5 r90
34: Top Overlay "+" at -25.513,-10.025 h1.5 r90; Bottom Overlay "+" at -25.513,-10.025 h1.5 r90
35: Top Overlay "+" at -15.013,-10.025 h1.5 r90; Bottom Overlay "+" at -15.013,-10.025 h1.5 r90
36: Top Overlay "+" at -4.513,-10.025 h1.5 r90; Bottom Overlay "+" at -4.513,-10.025 h1.5 r90
37: Top Overlay "+" at 5.987,-10.025 h1.5 r90; Bottom Overlay "+" at 5.987,-10.025 h1.5 r90
38: Top Overlay "+" at 16.487,-10.025 h1.5 r90; Bottom Overlay "+" at 16.487,-10.025 h1.5 r90
39: Top Overlay "+" at 26.987,-10.025 h1.5 r90; Bottom Overlay "+" at 26.987,-10.025 h1.5 r90
40: Top Overlay "+" at 37.487,-10.025 h1.5 r90; Bottom Overlay "+" at 37.487,-10.025 h1.5 r90
41: Top Overlay "+" at -36.013,-20.525 h1.5 r90; Bottom Overlay "+" at -36.013,-20.525 h1.5 r90
42: Top Overlay "+" at -25.513,-20.525 h1.5 r90; Bottom Overlay "+" at -25.513,-20.525 h1.5 r90
43: Top Overlay "+" at -15.013,-20.525 h1.5 r90; Bottom Overlay "+" at -15.013,-20.525 h1.5 r90
44: Top Overlay "+" at -4.513,-20.525 h1.5 r90; Bottom Overlay "+" at -4.513,-20.525 h1.5 r90
45: Top Overlay "+" at 5.987,-20.525 h1.5 r90; Bottom Overlay "+" at 5.987,-20.525 h1.5 r90
46: Top Overlay "+" at 16.487,-20.525 h1.5 r90; Bottom Overlay "+" at 16.487,-20.525 h1.5 r90
47: Top Overlay "+" at 26.987,-20.525 h1.5 r90; Bottom Overlay "+" at 26.987,-20.525 h1.5 r90
48: Top Overlay "+" at 37.487,-20.525 h1.5 r90; Bottom Overlay "+" at 37.487,-20.525 h1.5 r90
49: Top Overlay "+" at -36.013,-31.025 h1.5 r90; Bottom Overlay "+" at -36.013,-31.025 h1.5 r90
50: Top Overlay "+" at -25.513,-31.025 h1.5 r90; Bottom Overlay "+" at -25.513,-31.025 h1.5 r90
51: Top Overlay "+" at -15.013,-31.025 h1.5 r90; Bottom Overlay "+" at -15.013,-31.025 h1.5 r90
52: Top Overlay "+" at -4.513,-31.025 h1.5 r90; Bottom Overlay "+" at -4.513,-31.025 h1.5 r90
53: Top Overlay "+" at 5.987,-31.025 h1.5 r90; Bottom Overlay "+" at 5.987,-31.025 h1.5 r90
54: Top Overlay "+" at 16.487,-31.025 h1.5 r90; Bottom Overlay "+" at 16.487,-31.025 h1.5 r90
55: Top Overlay "+" at 26.987,-31.025 h1.5 r90; Bottom Overlay "+" at 26.987,-31.025 h1.5 r90
56: Top Overlay "+" at 37.487,-31.025 h1.5 r90; Bottom Overlay "+" at 37.487,-31.025 h1.5 r90
57: Top Overlay "+" at -36.013,-41.525 h1.5 r90; Bottom Overlay "+" at -36.013,-41.525 h1.5 r90
58: Top Overlay "+" at -25.513,-41.525 h1.5 r90; Bottom Overlay "+" at -25.513,-41.525 h1.5 r90
59: Top Overlay "+" at -15.013,-41.525 h1.5 r90; Bottom Overlay "+" at -15.013,-41.525 h1.5 r90
60: Top Overlay "+" at -4.513,-41.525 h1.5 r90; Bottom Overlay "+" at -4.513,-41.525 h1.5 r90
61: Top Overlay "+" at 5.987,-41.525 h1.5 r90; Bottom Overlay "+" at 5.987,-41.525 h1.5 r90
62: Top Overlay "+" at 16.487,-41.525 h1.5 r90; Bottom Overlay "+" at 16.487,-41.525 h1.5 r90
63: Top Overlay "+" at 26.987,-41.525 h1.5 r90; Bottom Overlay "+" at 26.987,-41.525 h1.5 r90
64: Top Overlay "+" at 37.487,-41.525 h1.5 r90; Bottom Overlay "+" at 37.487,-41.525 h1.5 r90